# Altium PCB PCB.PcbDoc
Units mm, origin at the board's own origin, x right, y up, seen from the top; angles counter-clockwise.
Board outline 39.62 x 32.77 mm, 2 copper layers (Top Layer, Bottom Layer); 35 components, 26 nets, 140 pads, 199 vias.
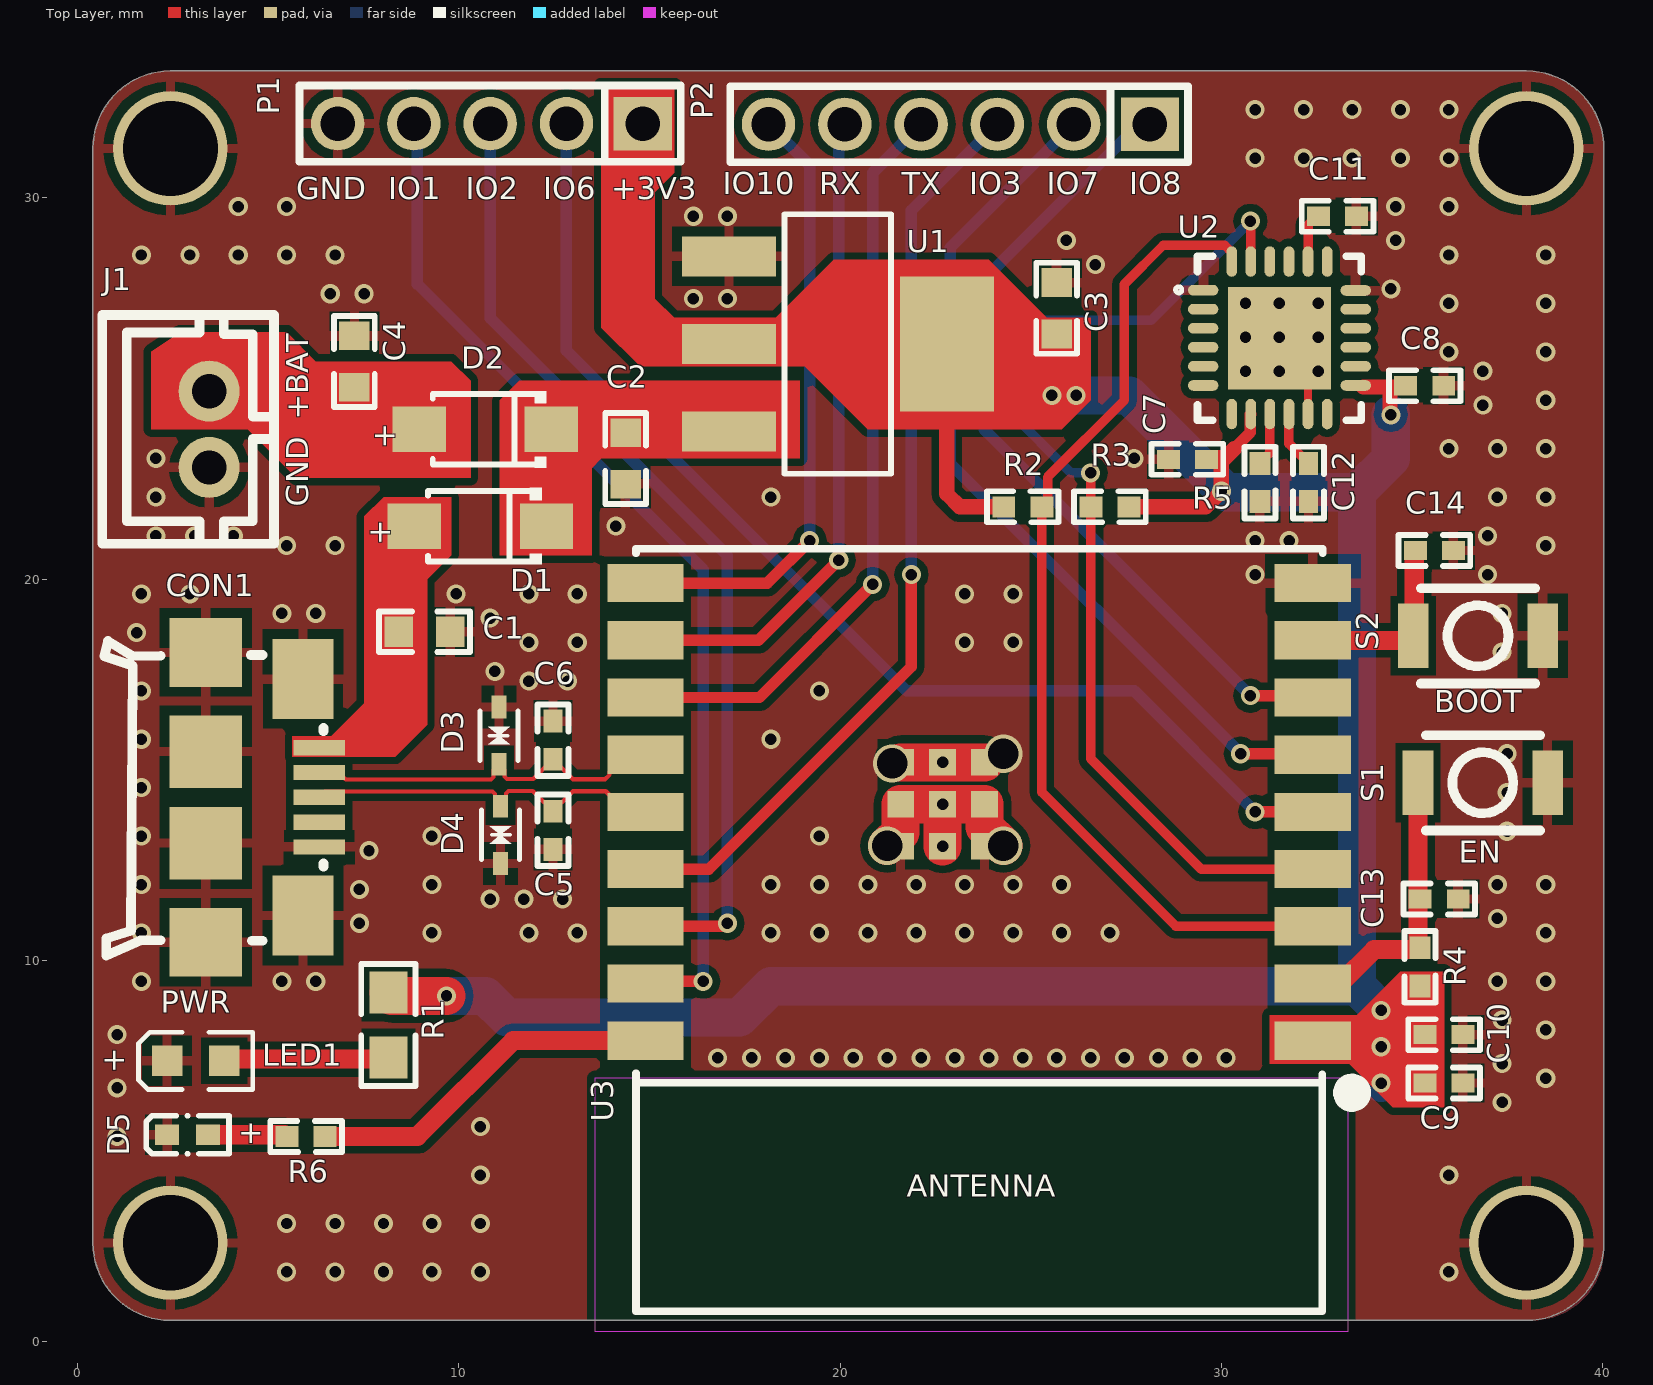
[diagram p0: Top Layer view]
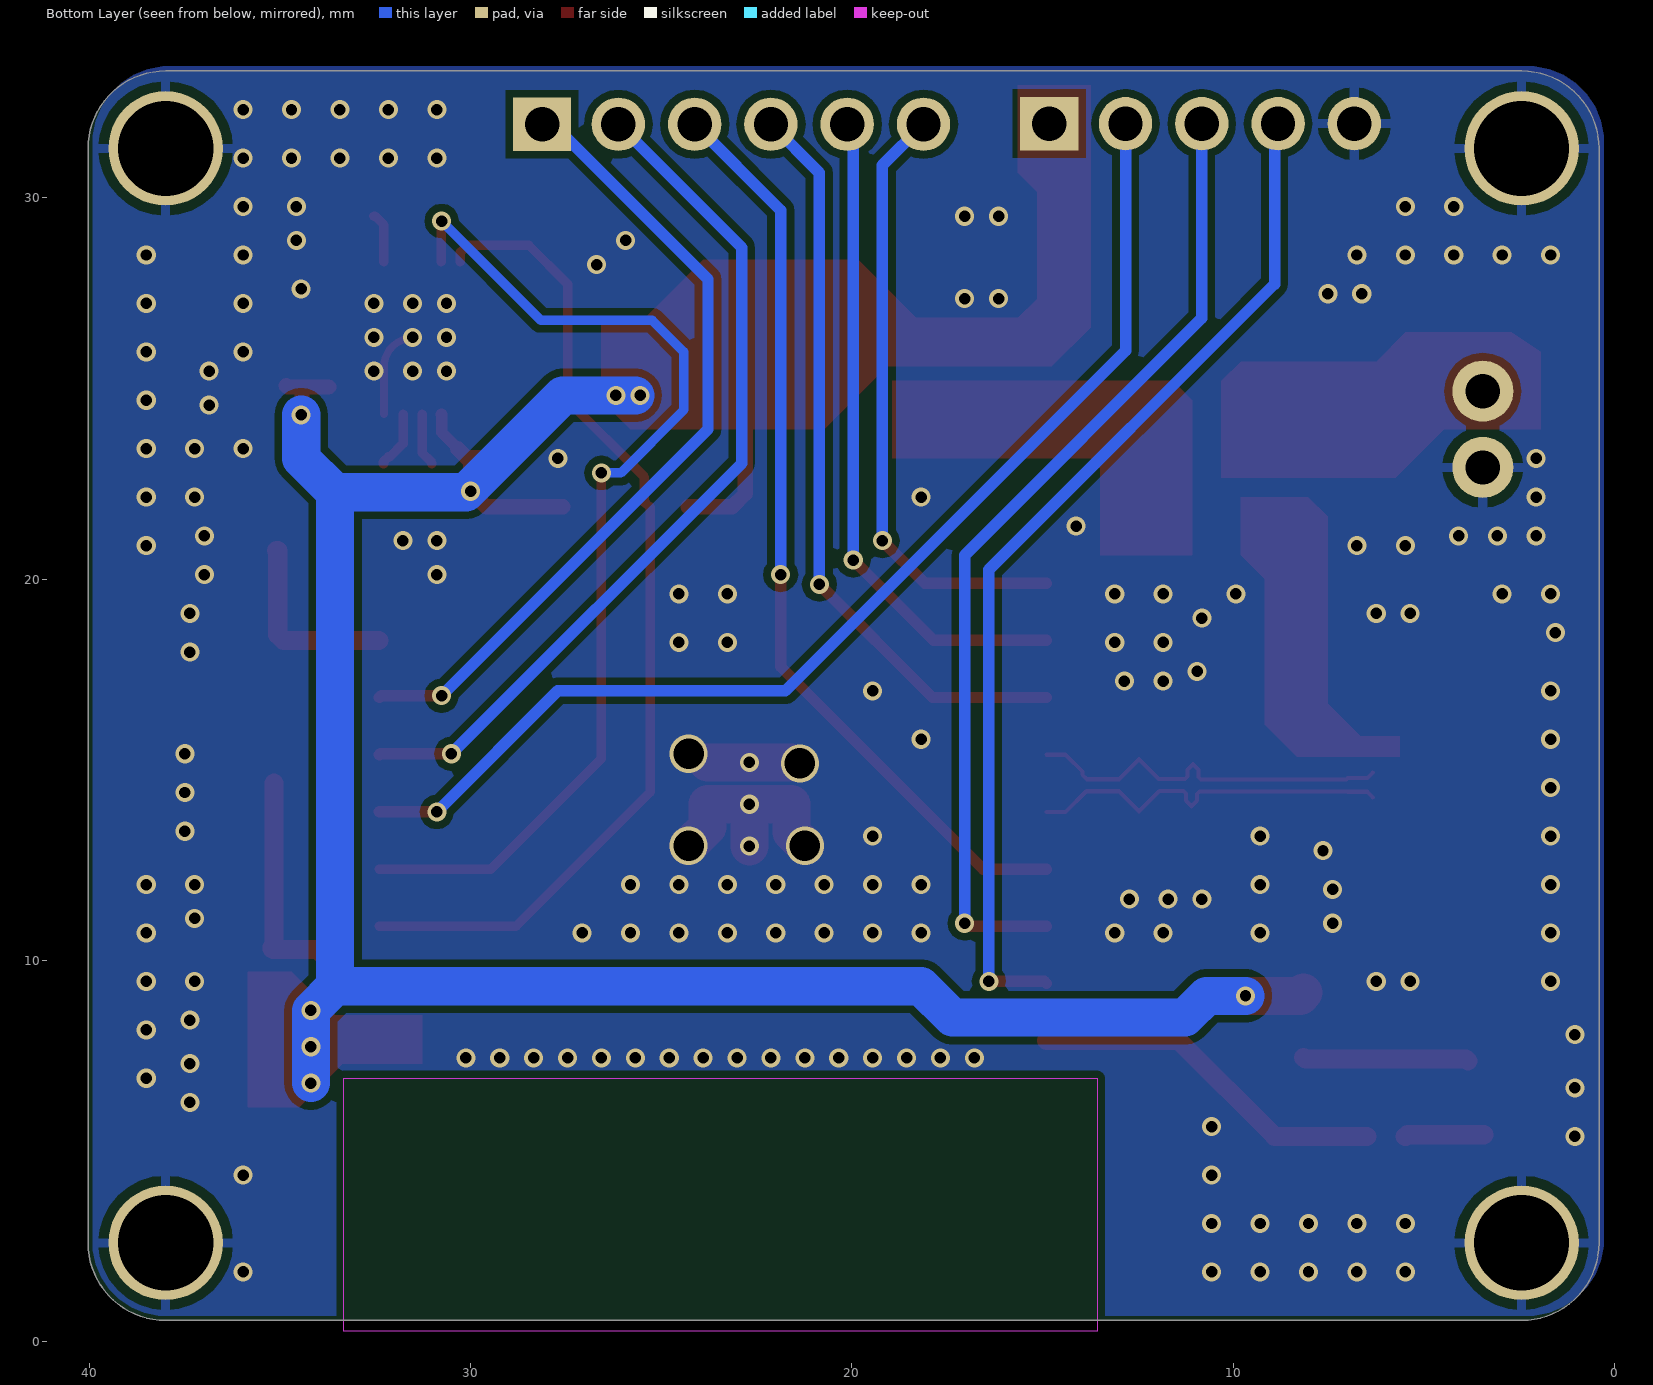
[diagram p1: Bottom Layer view, seen from below]
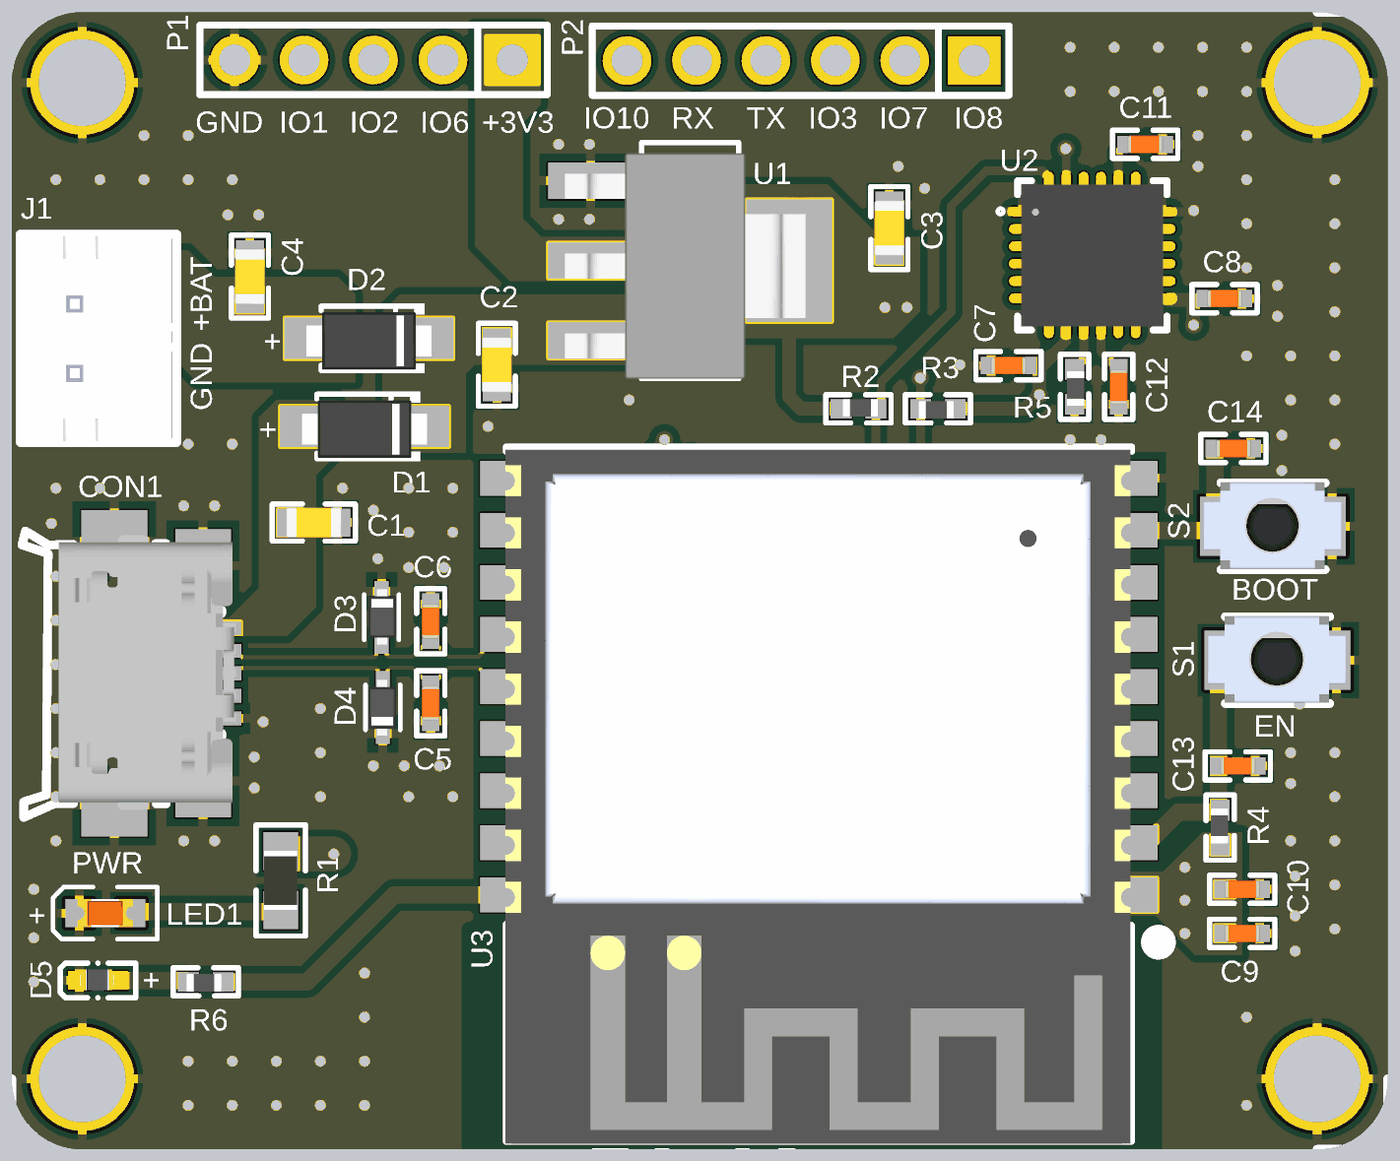
[diagram p2: 3D render of the assembled board from above, using the file's embedded part models]

## Layer stack, top to bottom
Top Solder: solder mask 0.0102, Solder Resist, Dk 3.5
Top Layer: signal copper 0.0356
Dielectric 1: dielectric 0.32, FR-4, Dk 4.8
Bottom Layer: signal copper 0.0356
Bottom Solder: solder mask 0.0102, Solder Resist, Dk 3.5

## Board outline
0.406,2.591 0.406,31.293 cw(c2.438,31.293) 2.438,33.325 37.998,33.325 cw(c37.998,31.293) 40.03,31.293 40.03,2.591 cw(c37.998,2.591) 37.998,0.559 2.438,0.559 cw(c2.438,2.591)

## Design rules (kind name [scope] priority, off if disabled: settings)
Clearance [All] p1: gap=0.2 ignorepadtopadclearanceinfootprint=FALSE except(0: Arc-Hole Track-Hole SMDPad-Hole THPad-Hole Via-Hole Fill-Hole Poly-Hole Region-Hole Text-Hole)
DiffPairsRouting DiffPairsRouting_1 [InDifferentialPairClass('90-OHM')] p1: maxlimit=0.2 minlimit=0.2 mostfreqgap=0.2 toplayer_minwidth=0.112 toplayer_maxwidth=0.112 toplayer_prefwidth=0.112 bottomlayer_minwidth=0.112 bottomlayer_maxwidth=0.112 bottomlayer_prefwidth=0.112 maxuncoupledlength=12.7
DiffPairsRouting [All] p2: maxlimit=0.254 minlimit=0.254 mostfreqgap=0.254 toplayer_minwidth=0.381 toplayer_maxwidth=0.381 toplayer_prefwidth=0.381 bottomlayer_minwidth=0.381 bottomlayer_maxwidth=0.381 bottomlayer_prefwidth=0.381 maxuncoupledlength=12.7
MinimumSolderMaskSliver [All] p1: minsoldermaskwidth=0.015
PolygonConnect [InNet('GND')] p1: thpad.connectstyle=Relief thpad.reliefconductorwidth=0.254 thpad.reliefentries=4 thpad.polygonreliefangle="90 Angle" thpad.airgapwidth=0.254 smdpad.connectstyle=Relief smdpad.reliefconductorwidth=0.254 smdpad.reliefentries=4 smdpad.polygonreliefangle="90 Angle" smdpad.airgapwidth=0.254 via.connectstyle=Direct via.reliefconductorwidth=0.254 via.reliefentries=4 via.polygonreliefangle="90 Angle" via.airgapwidth=0.254
RoutingVias [All] p1: holewidth=0.3 width=0.5 viastyle="Through Hole" minholewidth=0.3 minwidth=0.5 maxholewidth=0.4 maxwidth=0.6
SilkToSilkClearance [All] p1: silktosilkclearance=0.15
SilkToSolderMaskClearance [IsPad] p1: minsilkscreentomaskgap=0.015 clearancetoexposedcopper=TRUE
SolderMaskExpansion [All] p1: expansion=0.102
Width [All] p1: maxlimit=3 minlimit=0.2 preferedwidth=0.254
26 further rules are at their usual default settings.

## Classes and differential pairs
differential pair class 90-OHM: D
differential pair D: +D_P -D_N

## Components (designator, comment, footprint, x,y, rotation, side; value= is the part's Value field where it differs from the comment)
C1 "10uF" CAPC1608X06L 9.104,18.618 r0 top
C2 "10uF" CAPC1608X06L 14.376,23.165 r270 top
C3 "22uF" CAPC1608X06L 25.679,27.102 r90 top
C4 "10uF" CAPC1608X06L 7.264,25.705 r90 top
C5 "22pF" CAPC1005X04L 12.471,13.411 r270 top
C6 "22pF" CAPC1005X04L 12.471,15.773 r90 top
C7 "0.01uF" CAPC1005X04L 29.108,23.14 r180 top
C8 "100nF" CAPC1005X04L 35.331,25.07 r0 top
C9 "10uF" CAPC1005X04L 35.839,6.782 r0 top
C10 "100nF" CAPC1005X04L 35.839,8.052 r0 top
C11 "2200pF" CAPC1005X04L 33.045,29.515 r0 top
C12 "100nF" CAPC1005X04L 32.283,22.53 r270 top
C13 "1uF" CAPC1005X04L 35.712,11.608 r0 top
C14 "100nF" CAPC1005X04L 35.585,20.752 r180 top
CON1 "10118192-0002LF" CONN_USB-B-MICRO-SMD-10118192-0002LF 4.851,14.275 r270 top locked
D1 "1N5819HW1-7-F" SOD-123FL 10.566,21.387 r180 top
D2 "1N5819HW1-7-F" SOD-123FL 10.693,23.927 r180 top
D3 "LESD5D5.0CT1G" SOD-523 11.074,15.926 r270 top
D4 "LESD5D5.0CT1G" SOD-523 11.074,13.259 r90 top
D5 "BLUE" LED_SMD_0402-BLUE 2.946,5.385 r0 top
J1 "BATT" CONN-TH_B2B-PH-K-S 3.454,23.927 r90 top locked value="HDR-3, 1mm"
LED1 "RED" LED_SMD-0603 3.073,7.417 r0 top
P1 "IO" CONN_HEADER_5P_2mm 12.344,31.928 r180 top
P2 "IO" CONN_HEADER_6P_2mm 23.662,32.039 r180 top
R1 "150R" RESC1608X06N 8.153,8.306 r0 top
R2 "10K" RESC1005X04L_C 24.79,21.895 r180 top
R3 "10K" RESC1005X04L_C 27.076,21.895 r0 top
R4 "10K" RESC1005X04L_C 35.204,9.83 r270 top
R5 "10K" RESC1005X04L_C 31.013,22.53 r90 top
R6 "50R" RESC1005X04L_C 5.994,5.385 r0 top
S1 "B3U-1000P" BUTTON-SMD-2.3x3mm_2P_B3U-1000P 36.855,14.656 r90 top
S2 "B3U-1000P" BUTTON-SMD-2.3x3mm_2P_B3U-1000P 36.728,18.511 r90 top
U1 "AiP1117-3.3GH.TR" SOT-223 19.456,26.34 r180 top
U2 "MPU-6050" QFN-24_4x4mm 31.521,26.34 r0 top
U3 "ESP32-C3-WROOM-02-N4" ESP32-C3-WROOM-02-N4-4MB 23.647,13.894 r180 top

## Footprints (in the part's own frame and the unit in brackets; to place one, negate y for a bottom-side part, rotate by r counter-clockwise, add the part's x,y. Pads: shape width x height; smd on the part's side, far side on the other; paste and mask are expansions set on the pad)
BUTTON-SMD-2.3x3mm_2P_B3U-1000P [mm]
  rect 1.7x0.8 smd: 1(0,1.7) 2(0,-1.7)
  silkscreen extent -1.25,-1.5 1.25,1.5, body extent -1.23,-1.98 1.27,2.02, height 1.6
CAPC1005X04L [mm]
  rect 0.6x0.5 smd mask+0.04: 1(-0.5,0) 2(0.5,0)
  silkscreen extent -0.94,-0.41 0.94,0.41, body extent -0.51,-0.25 0.51,0.25, height 0.5
CAPC1608X06L [mm]
  rect 0.75x0.8 smd mask+0.04: 1(-0.675,0) 2(0.675,0)
  silkscreen extent -1.19,-0.53 1.19,0.53, body extent -0.8,-0.43 0.8,0.43, height 0.8
CONN-TH_B2B-PH-K-S [mm]
  round 1.6 hole 0.9 paste+0 mask+0.051: 1(1,0) 2(-1,0)
  silkscreen extent -3,-1.7 3,2.8, body extent -2.96,-1.56 2.94,2.94, height 6
CONN_HEADER_5P_2mm [mm]
  rect 1.524x1.4 hole 0.9 paste+0 mask+0.051: 1(-2.48,-0.016)
  round 1.4 hole 0.9 paste+0 mask+0.051: 2(-0.48,-0.016) 3(1.52,-0.016) 4(3.52,-0.016) 5(5.52,-0.016)
  silkscreen extent -3.48,-1.02 6.52,0.98
CONN_HEADER_6P_2mm [mm]
  rect 1.524x1.4 hole 0.9 paste+0 mask+0.051: 1(-4.461,0.111)
  round 1.4 hole 0.9 paste+0 mask+0.051: 2(-2.461,0.111) 3(-0.461,0.111) 4(1.539,0.111) 5(3.539,0.111) 6(5.539,0.111)
  silkscreen extent -5.46,-0.89 6.54,1.11
CONN_USB-B-MICRO-SMD-10118192-0002LF [mm]
  rect 0.4x1.35 smd paste+0 mask+0.051: 1(-1.3,1.487) 2(-0.65,1.487) 3(0,1.487) 4(0.65,1.487) 5(1.3,1.487)
  rect 1.8x1.9 smd paste+0 mask+0.051: 5(-3.8,-1.487) 5(3.8,-1.487)
  rect 2.1x1.6 smd paste+0 mask+0.051: 5(-3.1,1.063) 5(3.1,1.063)
  rect 1.9x1.9 smd paste+0 mask+0.051: 5(-1.199,-1.487) 5(1.199,-1.487)
  silkscreen extent -4.1,-4.15 4.15,1.6, body extent -3.98,-3.09 3.93,2.01, height 2.79
ESP32-C3-WROOM-02-N4-4MB [mm]
  rect 2x1 smd paste+0 mask+0.05: 1(-8.75,6) 2(-8.75,4.5) 3(-8.75,3) 4(-8.75,1.5) 5(-8.75,0) 6(-8.75,-1.5) 7(-8.75,-3) 8(-8.75,-4.5) 9(-8.75,-6) 10(8.75,-6) 11(8.75,-4.5) 12(8.75,-3) 13(8.75,-1.5) 14(8.75,0) 15(8.75,1.5) 16(8.75,3) 17(8.75,4.5) 18(8.75,6)
  rect 0.7x0.7 smd paste+0 mask+0.05: 19(-0.14,0.9) 19(-0.14,-0.2) 19(-0.14,-1.3) 19(0.96,0.9) 19(0.96,-0.2) 19(0.96,-1.3) 19(2.06,-1.3) 19(2.06,-0.2) 19(2.06,0.9)
  silkscreen extent -10.03,-6.9 9,13.1, body extent -8.97,-6.82 9.03,13.17, height 3.35
LED_SMD-0603 [mm]
  rect 0.8x0.8 smd: 1(-0.725,-0.051) 2(0.775,-0.051)
  silkscreen extent -1.47,-0.8 1.53,0.7, body extent -0.77,-0.45 0.83,0.35, height 0.6
LED_SMD_0402-BLUE [mm]
  rect 0.636x0.54 smd paste-100 mask+0.051: 1(0.48,0.041) 2(-0.597,0.041)
  silkscreen extent -1.14,-0.5 1.03,0.58, body extent -0.58,-0.24 0.42,0.36, height 0.2
QFN-24_4x4mm [mm]
  oval 0.8x0.28 smd paste-100 mask+0.05: 1(-2,1.237) 2(-2,0.737) 3(-2,0.237) 4(-2,-0.263) 5(-2,-0.763) 6(-2,-1.263) 13(2,-1.263) 14(2,-0.763) 15(2,-0.263) 16(2,0.237) 17(2,0.737) 18(2,1.229)
  oval 0.28x0.8 smd paste-100 mask+0.05: 7(-1.25,-2.012) 8(-0.75,-2.013) 9(-0.25,-2.012) 10(0.25,-2.013) 11(0.75,-2.012) 12(1.25,-2.013) 19(1.25,1.987) 20(0.75,1.988) 21(0.25,1.987) 22(-0.25,1.988) 23(-0.75,1.987) 24(-1.25,1.988)
  rect 2.7x2.7 smd paste-100 mask+0.05: 25(0,-0.025)
  silkscreen extent -2.72,-2.18 2.15,2.13, body extent -2.04,-2.07 2.05,2.02, height 0.94
RESC1005X04L_C [mm]
  rect 0.6x0.55 smd mask+0.04: 1(-0.5,0) 2(0.5,0)
  silkscreen extent -0.94,-0.41 0.94,0.41, body extent -0.55,-0.28 0.45,0.22, height 0.4
RESC1608X06N [mm]
  rect 1x1.1 smd mask+0.05: 1(0,-0.85) 2(0,0.85)
  silkscreen extent -0.71,-1.6 0.71,1.6, body extent -0.47,-0.85 0.48,0.85, height 0.6
SOD-123FL [mm]
  rect 1.4x1.2 smd paste+0 mask+0.051: 1(1.735,0) 2(-1.735,0)
  silkscreen extent -1.6,-1 1.38,1, body extent -1.8,-0.75 1.8,0.9, height 0.95
SOD-523 [mm]
  rect 0.6x0.4 smd paste+0 mask+0.051: 1(-0.716,-0.019) 2(0.784,-0.019)
  silkscreen extent -0.62,-0.52 0.68,0.48, body extent -0.77,-0.4 0.83,0.4, height 0.7
SOT-223 [mm]
  rect 2.465x1.05 smd paste+0 mask+0.051: 1(2.374,-2.125) 2(2.374,0.175) 3(2.374,2.475)
  rect 2.465x3.54 smd paste+0 mask+0.051: 2(-3.341,0.175)
  silkscreen extent -1.88,-3.23 0.91,3.58, body extent -3.81,-2.92 3.12,3.58, height 1.84

## Part data
C1 C2 C4: library part C0402-1µ0, "Capacitor, X5R, ±5%, 6.3V", LCSC=C18800, Package=0603, ComponentLink1Description=Datasheet, ComponentLink1URL=N.A., ComponentLink2Description="Supplier link", ComponentLink2URL=N.A.
C3: library part C0402-1µ0, "Capacitor, X5R, ±5%, 6.3V", LCSC=C84419, Package=0603, ComponentLink1Description=Datasheet, ComponentLink1URL=N.A., ComponentLink2Description="Supplier link", ComponentLink2URL=N.A.
C5 C6: library part C0402-1µ0, "Capacitor, X5R, ±5%, 6.3V", LCSC=C696857, Package=0402, ComponentLink1Description=Datasheet, ComponentLink1URL=N.A., ComponentLink2Description="Supplier link", ComponentLink2URL=N.A.
C7 C11: library part C0402-1µ0, "Capacitor, X5R, ±5%, 6.3V", LCSC=C267411, Package=0402, ComponentLink1Description=Datasheet, ComponentLink1URL=N.A., ComponentLink2Description="Supplier link", ComponentLink2URL=N.A.
C8 C10 C12 C14: library part C0402-1µ0, "Capacitor, X5R, ±5%, 6.3V", LCSC=C513772, Package=0402, ComponentLink1Description=Datasheet, ComponentLink1URL=N.A., ComponentLink2Description="Supplier link", ComponentLink2URL=N.A.
C9 C13: library part C0402-1µ0, "Capacitor, X5R, ±5%, 6.3V", LCSC=C2992625, Package=0402, ComponentLink1Description=Datasheet, ComponentLink1URL=N.A., ComponentLink2Description="Supplier link", ComponentLink2URL=N.A.
CON1: library part CONN_USB-B-MICRO_SMD, LCSC=C2972784
D1 D2: library part "D Schottky", "Schottky Diode", LCSC=C117948
D3 D4: LCSC=C383211
D5: library part LED0, "Typical INFRARED GaAs LED", LCSC=C2844007
J1: library part SM03B-SRSS-TB, "1.0mm pitch connector side entry SMD", LCSC=C131337, Manufacturer="JST Sales America Inc.", Manufacturer Part Number=SM03B-SRSS-TB(LF)(SN), Part number IPS=00000001785, Artikkelnr Noca=N.A., Component Class=Connectors, ComponentLink1Description=Datasheet, ComponentLink1URL=N.A., ComponentLink2Description="Supplier link", ComponentLink2URL=N.A., Footprint Doc=SM03B-SRSS-TB, HelpURL=http://www.jst-mfg.com/product/pdf/eng/eSH.pdf, LatestRevisionDate=2017-10-09, Note="JST, Header", Pad Count=3, PartId=100500605, Part Number=SM03B-SRSS-TB, Published=2017-10-09, Supplier 1=Cabcon, Supplier 2=Digi-Key, Supplier Part Number 1=SM03B-SRSS-TB(LF)(SN), Supplier Part Number 2=455-1803-1-ND
LED1: library part LED0603_RED, "LED RED CLEAR SMD", Case/Package=0603, Case Code (Metric)=1608, Color=Red, Forward Current=30mA, Forward Voltage=2V, LCSC=C125099, Lens Color=Colorless, Manufacturer="Vishay Lite-On", Manufacturer Part Number=LTST-C191KRKT, Max Operating Temperature=85°C, Min Operating Temperature=-55°C, Package Quantity=1, Power Dissipation=75mW, Reverse Voltage=5V, Supplier Part Number 1=160-1447-1-ND, Test Current=20mA, Case Code (Imperial)=0603, Category=LEDs, ComponentLink1Description=https://datasheet.ciiva.com/11773/0900766b80dc02b2-11773601.pdf?src-supplier=RSComponents, ComponentLink1URL=https://datasheet.ciiva.com/11773/0900766b80dc02b2-11773601.pdf?src-supplier=RSComponents, ComponentLink2Description=https://datasheet.ciiva.com/12400/lite-on-ltst-c191krkt-190135-12400910.pdf?src-supplier=Mouser, ComponentLink2URL=https://datasheet.ciiva.com/12400/lite-on-ltst-c191krkt-190135-12400910.pdf?src-supplier=Mouser, ComponentLink3Description=https://datasheet.ciiva.com/16212/ltst-c191krkt-16212419.pdf?src-supplier=Future+Electronics, ComponentLink3URL=https://datasheet.ciiva.com/16212/ltst-c191krkt-16212419.pdf?src-supplier=Future+Electronics, ComponentLink4Description=https://datasheet.ciiva.com/15117/getdatasheetpartid-141922-15117737.pdf?src-supplier=Verical, ComponentLink4URL=https://datasheet.ciiva.com/15117/getdatasheetpartid-141922-15117737.pdf?src-supplier=Verical, ComponentLink5Description=https://datasheet.ciiva.com/2109/s-110-ltst-c191krkt-2109971.pdf?src-supplier=Digi-Key, ComponentLink5URL=https://datasheet.ciiva.com/2109/s-110-ltst-c191krkt-2109971.pdf?src-supplier=Digi-Key, ComponentLink6Description=https://datasheet.ciiva.com/2109/s-110-ltst-c191krkt-2109970.pdf?src-supplier=Digi-Key, ComponentLink6URL=https://datasheet.ciiva.com/2109/s-110-ltst-c191krkt-2109970.pdf?src-supplier=Digi-Key, ComponentLink7Description=https://datasheet.ciiva.com/2109/s-110-ltst-c191krkt-2109972.pdf?src-supplier=Digi-Key, ComponentLink7URL=https://datasheet.ciiva.com/2109/s-110-ltst-c191krkt-2109972.pdf?src-supplier=Digi-Key, Depth=0.8mm, Dominant Wavelength=631nm, Height=0.55mm, Illumination Color=Red, Lead Free="Lead Free", Length=1.6mm, Lens Style=Clear,Diffused,Colorless,Rectangular, Lens Transparency=Clear, Luminous Intensity=54mcd, Mount="Surface Mount", Number of Elements=1, Number of LEDs=1, Number of Pins=2, Packaging="Tape and Reel", Power Rating=75mW, Pricing 1="1=0.26000, 10=0.14100, 100=0.06560, 500=0.06060, 1000=0.04747, 2000=0.04646 (USD)", Radiation Hardening=No, RoHS=Yes, RoHS Compliant=Yes, Stock 1=1209111, Supplier 1=Digi-Key, Viewing Angle=130°, Voltage=2V, Wavelength=639nm, Width=0.8mm
P1: library part "Header 5", "Header, 5-Pin", LCSC=C541859
P2: library part "Header 6", "Header, 6-Pin", LCSC=C917593
R1: library part R0201-10k, "Resistor, ±1%, 0.05W", LCSC=C778412, Package=0603, ComponentLink1Description=Datasheet, ComponentLink1URL=N.A., ComponentLink2Description="Supplier link", ComponentLink2URL=N.A.
R2 R3 R4 R5: library part R0201-2R2, "Resistor, ±1%, 0.05W", LCSC=C328298, Package=0402, ComponentLink1Description=Datasheet, ComponentLink1URL=N.A., ComponentLink2Description="Supplier link", ComponentLink2URL=N.A.
R6: library part R0201-2R2, "Resistor, ±1%, 0.05W", LCSC=C853312, Package=0402, ComponentLink1Description=Datasheet, ComponentLink1URL=N.A., ComponentLink2Description="Supplier link", ComponentLink2URL=N.A.
S1 S2: library part SW-PB, "Switch", LCSC=C231329, Package=SMD
U1: library part AiP1117-3.3, LCSC=C2943304
U2: LCSC=C24112
U3: LCSC=C2934560

## Free pads (board coordinates)
  round 3 hole 2.5: 8(2.438,2.591) 8(2.438,31.293) 8(37.998,2.591) 8(37.998,31.293)

## Via types
v1: diameter 0.5, hole 0.3, Top Layer to Bottom Layer, tented both sides, 195 vias
v2: diameter 1, hole 0.8, Top Layer to Bottom Layer, tented both sides, 4 vias

## Nets (pads, with @x,y where several pads share a name; then routed paths per layer and width w, separated by ;. In a path a pad name is that pad's centre, name@x,y a point inside that pad or via, vN(x,y) a via of type N, cw(c..) or ccw(c..) an arc to the next point about the centre after c; other vN are vias at no path point)
+3V3: C3.1 C7.1 C8.1 C9.1 C10.1 P1.1 R1.2 R2.2 R3.2 R4.2 U1.2 U2.8 U2.13 U3.1 | length 65.8
  Top Layer w0.3: 30.338,23.419 30.388,23.469 30.388,23.475 30.762,23.848 30.762,24.317 U2.8
  Top Layer w0.4: U1.2@22.798,26.164 22.798,22.236 23.139,21.895 R2.2 ; R3.2 29.589,21.895 v1(29.997,22.303) 29.997,23.078 30.11,23.19 ; C7.1 29.658,23.19 30.11,23.19 ; 30.338,23.419 30.11,23.19 ; U2.13@33.721,25.037 34.799,25.037 C8.1 ; 34.423,24.874 34.423,24.327 v1(34.442,24.308)
  Top Layer w1: R1.2 8.241,9.068 v1(9.677,9.068)
  Bottom Layer w1: v1(9.677,9.068) 10.693,9.068 11.262,8.499 17.363,8.499 18.186,9.322 33.553,9.322 ; v1@25.679,24.816 v1(26.187,24.816) 27.584,24.816 30.124,22.276 33.553,22.276 ; v1(34.188,6.782) v1(34.188,7.734) v1(34.188,8.687) 33.553,9.322 ; v1(34.442,24.308) 34.442,23.165 33.553,22.276 ; 33.553,9.322 33.553,22.276
  other v1: 25.552,24.816
D_N: C6.1 CON1.2 D3.2 U3.13 | length 9.9
  Top Layer w0.112: CON1.2 6.483,14.781 6.998,14.781 7.039,14.74 10.846,14.74 10.911,14.806 10.911,14.998 D3.2 11.199,14.998 11.199,14.822 11.265,14.756 11.954,14.756 C6.1 12.997,14.748 13.836,14.748 13.953,14.865 13.953,14.95 14.397,15.394 U3.13
D_P: C5.1 CON1.3 D4.2 U3.14 | length 9.8
  Top Layer w0.112: CON1.3 6.483,14.419 6.998,14.419 7.008,14.428 10.884,14.428 10.95,14.363 10.95,14.187 D4.2 11.238,14.187 11.238,14.379 11.303,14.444 11.938,14.444 C5.1 12.997,14.436 13.855,14.436 14.397,13.894 U3.14
EN: C13.1 R4.1 S1.1 U3.2 | length 7.6
  Top Layer w0.5: U3.2 33.117,9.394 34.003,10.28 35.179,10.28 35.204,10.305 R4.1 35.204,10.355 35.155,10.404 S1.1
GND: C1.2 C2.2 C3.2 C4.2 C5.2 C6.2 C7.2 C8.2 C9.2 C10.2 C11.2 C12.2 C13.2 C14.1 CON1.5 D3.1 D4.1 D5.2 J1.2 LED1.1 P1.5 pad.8 R5.1 S1.2 S2.2 U1.1 U2.1 U2.11 U2.18 U2.25 U3.9 U3.19 | length 10.4
  Top Layer w0.2: U2.25 cw(c31.521,25.565) 32.272,25.565 U2.11
  Top Layer w1: v2(21.234,13.005) 21.587,13.358 21.587,14.094 v1(22.687,14.094) ; U3.19@21.587,15.194 v1(22.687,15.194) U3.19@23.787,15.194 ; v1(22.687,12.994) v1(22.687,14.094) ; v2(24.282,13.005) 23.787,13.5 23.787,14.094 v1(22.687,14.094)
  other v1: 5.486,1.829 6.756,1.829 8.026,1.829 9.296,1.829 10.566,1.829 35.966,1.829 5.486,3.099 6.756,3.099 8.026,3.099 9.296,3.099 10.566,3.099 10.566,4.369 35.966,4.369 1.041,5.385 10.566,5.639 37.363,6.274 1.041,6.655 38.506,6.909 37.363,7.29 16.789,7.442 17.678,7.442 18.567,7.442 19.456,7.442 20.345,7.442 21.234,7.442 22.123,7.442 23.012,7.442 23.901,7.442 24.79,7.442 25.679,7.442 26.568,7.442 27.457,7.442 28.346,7.442 29.235,7.442 30.124,7.442 1.041,8.052 38.506,8.179 37.363,8.433 1.676,9.449 5.359,9.449 6.248,9.449 37.236,9.449 38.506,9.449 1.676,10.719 9.296,10.719 11.836,10.719 13.106,10.719 18.186,10.719 19.456,10.719 20.726,10.719 21.996,10.719 23.266,10.719 24.536,10.719 25.806,10.719 27.076,10.719 38.506,10.719 7.391,10.973 37.236,11.1 10.82,11.608 11.709,11.608 12.725,11.608 7.391,11.862 1.676,11.989 9.296,11.989 18.186,11.989 19.456,11.989 20.726,11.989 21.996,11.989 23.266,11.989 24.536,11.989 25.806,11.989 37.236,11.989 38.506,11.989 7.645,12.878 1.676,13.259 9.296,13.259 19.456,13.259 37.49,13.386 37.49,14.402 1.676,14.529 37.49,15.418 1.676,15.799 18.186,15.799 1.676,17.069 19.456,17.069 11.836,17.323 12.852,17.323 10.947,17.577 37.363,18.085 11.836,18.339 13.106,18.339 23.266,18.339 24.536,18.339 1.549,18.593 10.82,18.974 5.359,19.101 6.248,19.101 37.363,19.101 1.676,19.609 2.946,19.609 9.931,19.609 11.836,19.609 13.106,19.609 23.266,19.609 24.536,19.609 30.886,20.117 36.982,20.117 5.486,20.879 6.756,20.879 38.506,20.879 30.886,21.006 31.775,21.006 2.057,21.133 3.073,21.133 4.089,21.133 36.982,21.133 14.122,21.387 2.057,22.149 18.186,22.149 37.236,22.149 38.506,22.149 2.057,23.165 27.711,23.165 35.966,23.419 37.236,23.419 38.506,23.419 36.855,24.562 38.506,24.689 30.632,25.451 31.521,25.451 32.537,25.451 36.855,25.451 35.966,25.959 38.506,25.959 30.632,26.34 31.521,26.34 32.537,26.34 30.632,27.229 31.521,27.229 32.537,27.229 35.966,27.229 38.506,27.229 16.154,27.356 17.043,27.356 6.629,27.483 7.518,27.483 34.442,27.61 26.695,28.245 1.676,28.499 2.946,28.499 4.216,28.499 5.486,28.499 6.756,28.499 35.966,28.499 38.506,28.499 25.933,28.88 34.569,28.88 16.154,29.515 17.043,29.515 4.216,29.769 5.486,29.769 34.569,29.769 35.966,29.769 30.886,31.039 32.156,31.039 33.426,31.039 34.696,31.039 35.966,31.039 30.886,32.309 32.156,32.309 33.426,32.309 34.696,32.309 35.966,32.309
  other v2: 21.361,15.164 24.282,15.418
GPIO0: R6.2 U3.18 | length 9.4
  Top Layer w0.5: R6.2 8.915,5.385 11.424,7.894 U3.18
GPIO9: C14.2 S2.1 U3.8 | length 5
  Top Layer w0.5: U3.8 34.911,18.394 S2.1 35.057,18.539 35.057,20.752 C14.2
IO1: P1.4 U3.17 | length 27.1
  Top Layer w0.3: U3.17 14.952,9.449 v1(16.408,9.449)
  Bottom Layer w0.3: P1.4@8.915,31.944 8.915,27.737 16.408,20.244 v1(16.408,9.449)
IO2: P1.3 U3.16 | length 25.7
  Top Layer w0.3: U3.16 16.91,10.894 16.989,10.973 v1(17.043,10.973)
  Bottom Layer w0.3: P1.3 10.824,26.844 17.043,20.625 v1(17.043,10.973)
IO3: P2.3 U3.15 | length 24.3
  Top Layer w0.3: U3.15 16.559,12.394 21.869,17.704 v1(21.869,20.117)
  Bottom Layer w0.3: v1(21.869,20.117) 21.869,29.674 P2.3
IO6: P1.2 U3.5 | length 30.5
  Top Layer w0.3: v1(30.886,13.894) U3.5
  Bottom Layer w0.3: P1.2 12.824,25.987 21.742,17.069 27.711,17.069 v1(30.886,13.894)
IO7: P2.2 U3.6 | length 22.9
  Top Layer w0.3: v1(30.505,15.418) 32.373,15.418 U3.6
  Bottom Layer w0.3: P2.2 22.885,28.69 22.885,23.038 v1(30.505,15.418)
IO8: P2.1 U3.7 | length 21.5
  Top Layer w0.3: v1(30.759,16.942) 32.349,16.942 U3.7
  Bottom Layer w0.3: P2.1 27.838,31.928 23.774,27.864 23.774,23.927 v1(30.759,16.942)
IO10: P2.6 U3.10 | length 16.1
  Top Layer w0.3: U3.10 18.09,19.894 v1(19.202,21.006)
  Bottom Layer w0.3: P2.6 19.202,30.849 v1(19.202,21.006)
NetC2_1: C2.1 D1.2 D2.2 U1.3
NetC11_1: C11.1 U2.20 | length 1.3
  Top Layer w0.25: U2.20 32.272,29.291 32.495,29.515 C11.1
NetC12_1: C12.1 U2.10 | length 1.5
  Top Layer w0.25: U2.10 31.772,23.552 32.119,23.205 32.158,23.205 32.283,23.08 C12.1
NetD5_1: D5.1 R6.1 | length 2.1
  Top Layer w0.5: D5.1 5.428,5.426 5.469,5.385 R6.1
NetLED1_2: LED1.2 R1.1 | length 4.3
  Top Layer w0.5: LED1.2 3.894,7.411 8.109,7.411 R1.1
NetR5_2: R5.2 U2.9 | length 1.4
  Top Layer w0.25: R5.2 31.013,23.055 31.272,23.313 U2.9
RXD: P2.5 U3.11 | length 17.4
  Top Layer w0.3: U3.11 17.86,18.394 v1(19.964,20.498)
  Bottom Layer w0.3: v1(19.964,20.498) 19.964,31.769 P2.5
SCL: R3.1 U2.23 U3.4 | length 27.7
  Top Layer w0.25: v1(26.568,22.784) 26.572,22.78 26.572,21.899 R3.1 26.576,15.283 29.465,12.394 U3.4 ; v1(30.759,29.388) 30.772,29.376 U2.23
  Bottom Layer w0.25: v1(26.568,22.784) 26.06,22.784 24.409,24.435 24.409,25.959 25.235,26.784 28.156,26.784 v1(30.759,29.388)
SDA: R2.1 U2.24 U3.3 | length 26.4
  Top Layer w0.25: U2.24 30.272,28.567 30.086,28.753 28.473,28.753 27.457,27.737 27.457,24.689 25.44,22.672 25.44,22.02 25.315,21.895 R2.1 25.29,14.41 28.806,10.894 U3.3
TXD: P2.4 U3.12 | length 19.8
  Top Layer w0.3: U3.12 17.884,16.894 v1(20.853,19.863)
  Bottom Layer w0.3: v1(20.853,19.863) 20.853,30.658 P2.4
VBAT: C4.1 D2.1 J1.1
VBUS: C1.1 CON1.1 D1.1
pads on no net: CON1.4 U2.2 U2.3 U2.4 U2.5 U2.6 U2.7 U2.12 U2.14 U2.15 U2.16 U2.17 U2.19 U2.21 U2.22

## Polygon pours and split planes (outlines as drawn)
GND on Bottom Layer (solid, pour order 2): 37.871,33.452 cw(c37.871,31.42) 39.903,31.42 39.903,2.591 cw(c37.998,2.591) 37.998,0.686 2.311,0.686 cw(c2.311,2.718) 0.279,2.718 0.279,31.42 cw(c2.311,31.42) 2.311,33.452
GND on Top Layer (solid, pour order 0): 37.998,33.325 cw(c37.998,31.293) 40.03,31.293 40.03,2.464 cw(c38.125,2.464) 38.125,0.559 2.438,0.559 cw(c2.438,2.591) 0.406,2.591 0.406,31.293 cw(c2.438,31.293) 2.438,33.325

## Keep-outs
Keep-Out Layer:
  rectangle: 13.564,0.279 33.325,6.909

## Other copper
Top Layer:
  region net +3V3: 31.267,8.56 33.553,8.56 34.696,9.703 35.839,9.703 35.839,6.147 34.493,6.147 33.35,7.29 31.267,7.29
  region net +3V3: 15.646,26.848 15.138,27.356 15.138,30.15 15.646,30.658 15.646,32.944 13.741,32.944 13.741,26.594 14.757,25.578 19.075,25.578 20.726,23.927 25.806,23.927 26.568,24.689 26.568,26.848 25.425,26.848 23.901,28.372 19.837,28.372 18.313,26.848
  region net NetC2_1: 11.074,24.689 11.582,25.197 18.948,25.197 18.948,23.165 13.741,23.165 13.487,22.911 13.487,20.625 11.074,20.625
  region net VBUS: 5.639,15.875 6.655,15.875 7.518,16.739 7.518,21.641 8.026,22.149 9.804,22.149 9.804,20.625 9.169,19.99 9.169,16.18 8.331,15.342 5.639,15.342
  region net VBAT: 2.692,26.467 5.486,26.467 6.248,25.705 9.804,25.705 10.312,25.197 10.312,22.657 5.74,22.657 4.47,23.927 1.93,23.927 1.93,25.959

## Silkscreen, mask and mechanical layers (free items; w line width, h text height)
Top Overlay:
  text "IO10" at 16.916,29.896 h1
  text "RX" at 19.456,29.896 h1
  text "TX" at 21.615,29.896 h1
  text "IO3" at 23.393,29.896 h1
  text "IO7" at 25.425,29.896 h1
  text "IO8" at 27.584,29.896 h1
  text "GND" at 5.74,29.769 h1
  text "IO1" at 8.153,29.769 h1
  text "IO2" at 10.185,29.769 h1
  text "IO6" at 12.217,29.769 h1
  text "+3V3" at 13.995,29.769 h1
  text "+BAT" at 6.248,24.181 h1 r90
  text "GND" at 6.248,21.895 h1 r90
  text "BOOT" at 35.585,16.307 h1
  text "EN" at 36.22,12.37 h1
  text "PWR" at 2.184,8.433 h1
Mechanical 1:
  the board outline again, w0.127

## Dimensions
37.998,0.559 to 37.998,33.325 on Top Overlay
0.406,2.591 to 40.03,2.591 on Top Overlay

## Text inside footprints (layer, text, board x,y; h text height)
D1: Top Overlay "+" at 7.49,21.551 h1 r270
D2: Top Overlay "+" at 7.617,24.091 h1 r270
D5: Top Overlay "+" at 4.216,5.004 h1
LED1: Top Overlay "+" at 1.422,7.036 h1 r90
U3: Top Overlay "ANTENNA" at 21.742,3.607 h1